# EAGLE board generic_controller_pcb (EAGLE 9.6.2)
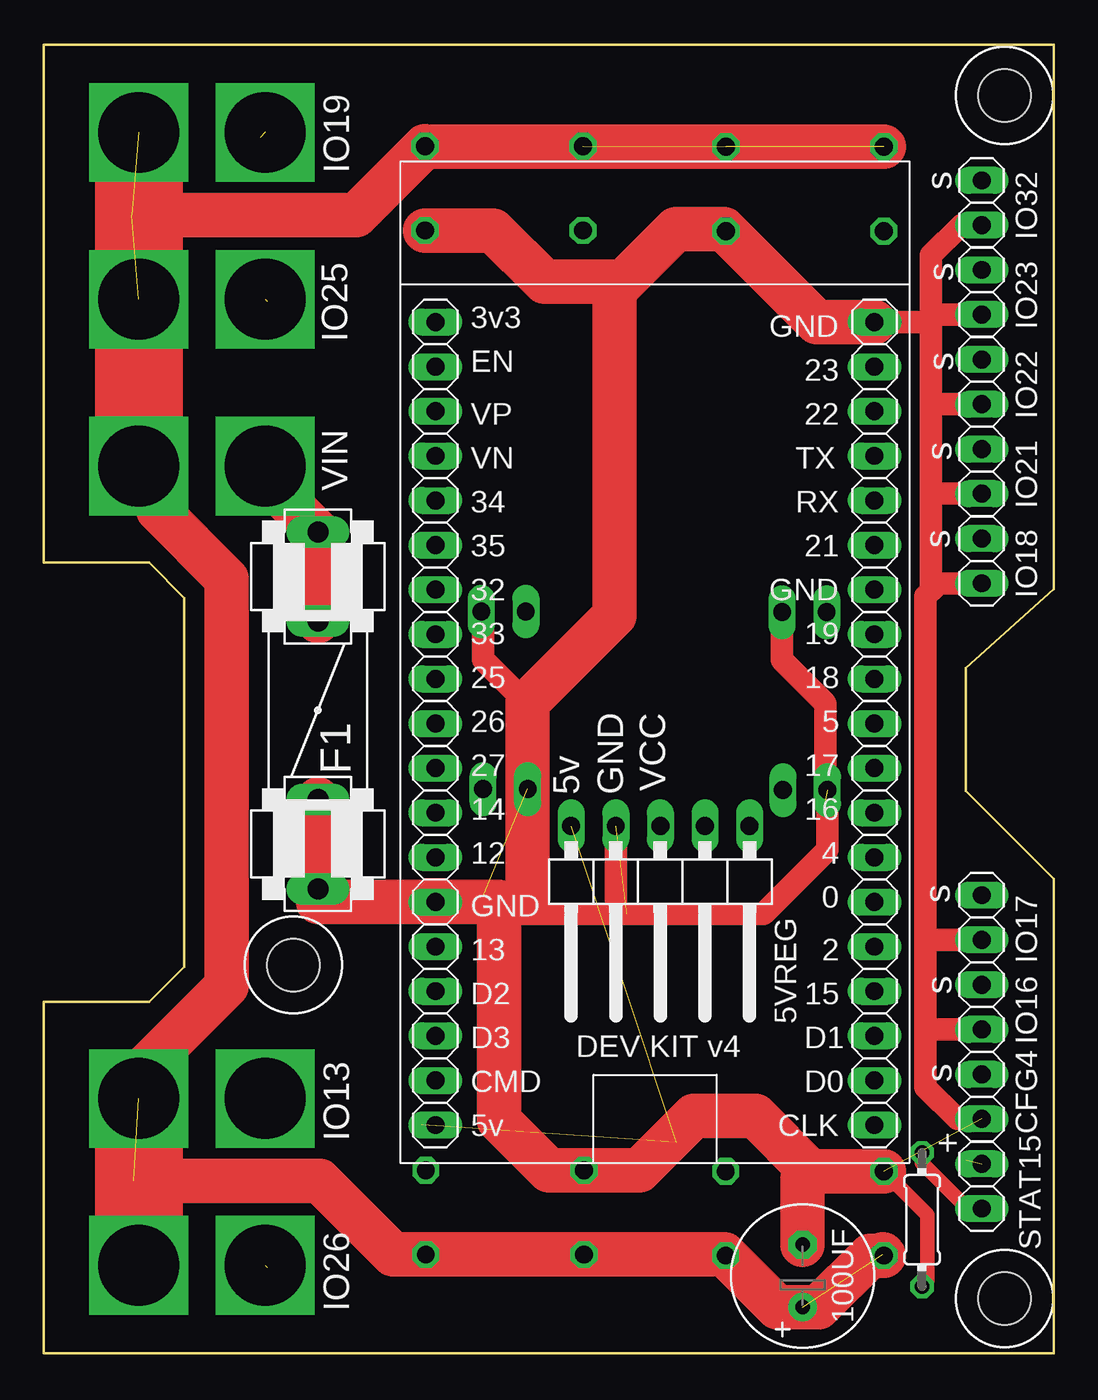
[diagram p0: board, top side]
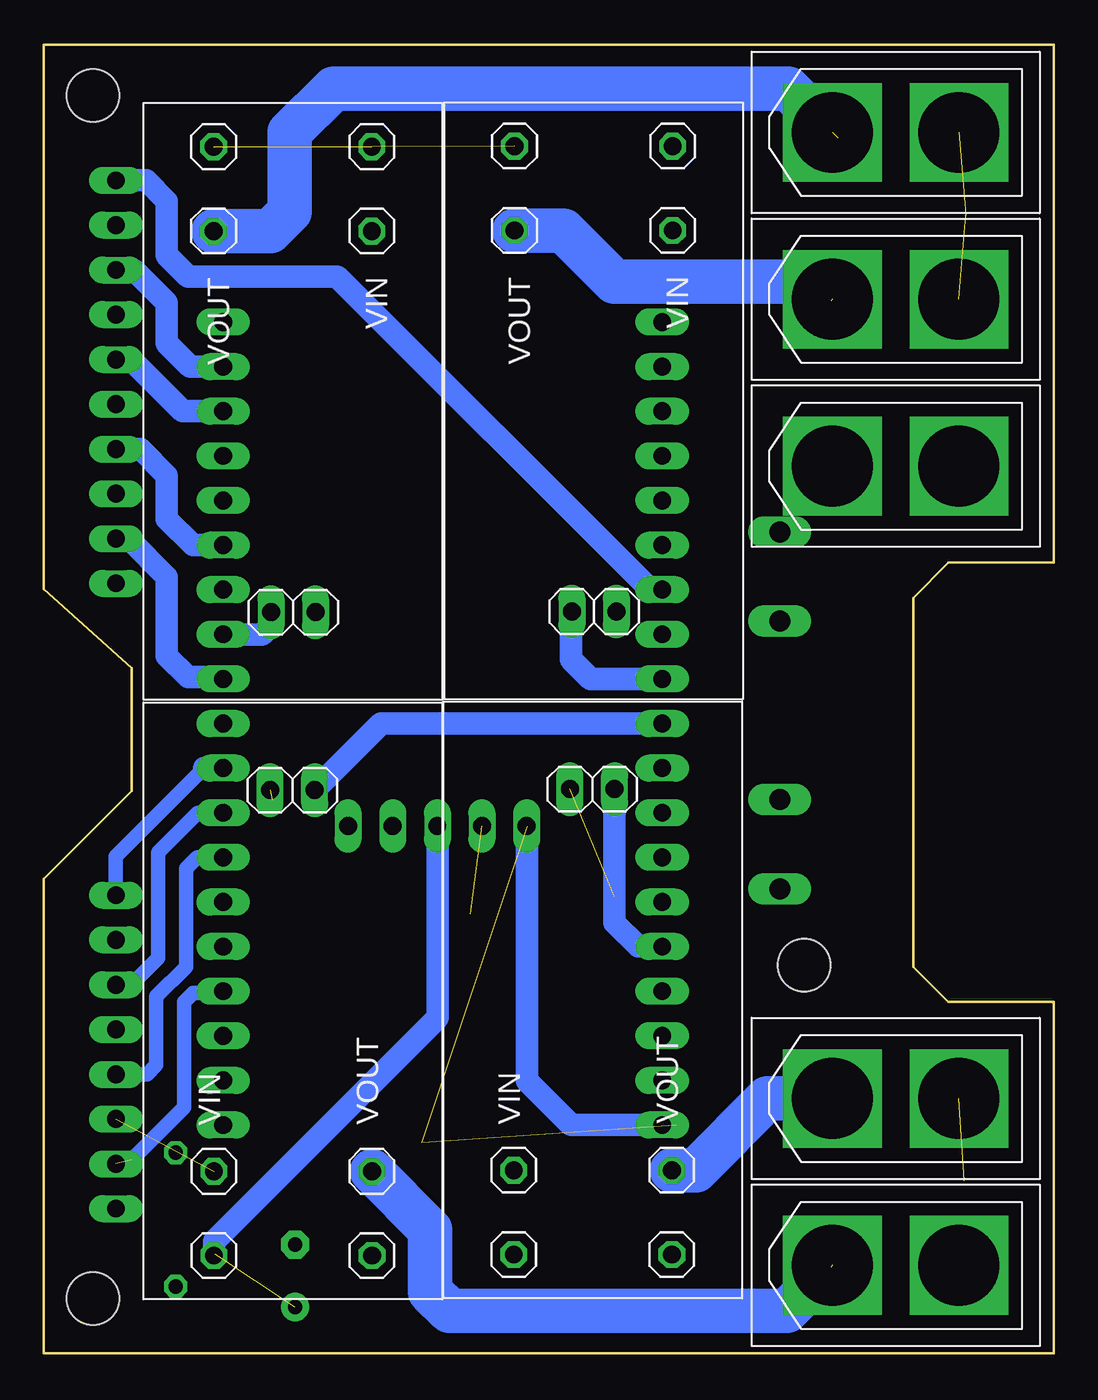
[diagram p1: board, bottom side, seen from below]

Size 57.5 x 74.5 mm. Coordinates in mm from the lower left corner, seen from the top.
Outline: 8,43 8,22 6,20 0,20 0,0 57.5,0 57.5,27 52.5,32 52.5,39 57.5,43.5 57.5,74.5 0,74.5 0,45 6,45 8,43
Copper layers (1*16): Top 0.035mm / dielectric 1.5mm / Bottom 0.035mm
Design rules "default": minimum track width 6mil, minimum drill 0.35mm, track to track 6mil, track to pad 6mil, pad to pad 6mil, via to via 6mil, smd to smd 6mil, copper to edge 40mil, drill to drill 6mil, minimum pad ring 10mil, minimum via ring 8mil, stop-mask expansion 4mil, vias tented up to drill 0mil, thermal gap 10mil
Holes 3 mm at 14.2,22.1 54.7,3.1 54.7,71.6

## Footprints (pad centres in the part's own frame; a part is rotated, then mirrored left to right if it is on the bottom)
1X05/90 = drill 1.016 long: 1 -5.08,-3.81; 2 -2.54,-3.81; 3 0,-3.81; 4 2.54,-3.81; 5 5.08,-3.81
E3,5-8 = drill 0.813 pad 1.6: + -1.778,0 | drill 0.813 pad 1.6 octagon: - 1.778,0
1X02 = drill 1.016 long: 1 -1.27,0; 2 1.27,0
ESP32 = drill 1.016 long: 1 -21.59,12.7; 2 -19.05,12.7; 3 -16.51,12.7; 4 -13.97,12.7; 5 -11.43,12.7; 6 -8.89,12.7; 7 -6.35,12.7; 8 -3.81,12.7; 9 -1.27,12.7; 10 1.27,12.7; 11 3.81,12.7; 12 6.35,12.7; 13 8.89,12.7; 14 11.43,12.7; 15 13.97,12.7; 16 16.51,12.7; 17 19.05,12.7; 18 21.59,12.7; 19 24.13,12.7; 20 -21.59,-12.3; 21 -19.05,-12.3; 22 -16.51,-12.3; 23 -13.97,-12.3; 24 -11.43,-12.3; 25 -8.89,-12.3; 26 -6.35,-12.3; 27 -3.81,-12.3; 28 -1.27,-12.3; 29 1.27,-12.3; 30 3.81,-12.3; 31 6.35,-12.3; 32 8.89,-12.3; 33 11.43,-12.3; 34 13.97,-12.3; 35 16.51,-12.3; 36 19.05,-12.3; 37 21.59,-12.3; 38 24.13,-12.3
FMALECON = drill 4.6 square: + -3.6,0; - 3.6,0
SW-M221 = drill 1.016 octagon: 1 -26.5,0; 2 -21.7,0; 3 -26.5,-9; 4 -21.7,-9 | drill 1.016 long: 5 0,-3.2; 6 0,-5.74
FUSE1 = drill 1.194 long: 1A -10.16,0; 1B -5.08,0; 2A 10.16,0; 2B 5.08,0
0204/7 = drill 0.813 octagon: 1 -3.81,0; 2 3.81,0

## Placement (x,y rotation side)
5VREG  [1X05/90]  35.1,26.2 180 top
100UF  [E3,5-8]  43.2,4.4 90 top
CFG4  [1X02]  53.4,14.6 90 top
E$1  [ESP32]  34.59,37.12 270 top
E$2  [FMALECON]  9,60 180 bottom
E$3  [SW-M221]  21.7,42.22 270 bottom
E$4  [SW-M221]  47.82,32.05 90 bottom
E$5  [FMALECON]  9,5 180 bottom
E$6  [SW-M221]  30.75,32.11 90 bottom
E$7  [SW-M221]  38.83,42.19 270 bottom
E$8  [FMALECON]  9,14.5 180 bottom
E$9  [FMALECON]  9,50.5 180 bottom
E$14  [FMALECON]  9,69.5 180 bottom
F1  [FUSE1]  15.6,36.6 270 top
IO16  [1X02]  53.4,19.7 90 top
IO17  [1X02]  53.4,24.8 90 top
IO18  [1X02]  53.4,45.1 90 top
IO21  [1X02]  53.4,50.2 90 top
IO22  [1X02]  53.4,55.3 90 top
IO23  [1X02]  53.4,60.4 90 top
IO32  [1X02]  53.4,65.5 90 top
R1  [0204/7]  50,7.6 90 top
STAT15  [1X02]  53.4,9.5 90 top

## Library data of the parts
5VREG CFG4 IO16-IO18 IO21-IO23 IO32 STAT15 = pinhead
100UF R1 = rcl
E$1 = ESP23 DevKitv4
E$2 E$5 E$8 E$9 E$14 = XT60Con
E$3 E$4 E$6 E$7 = SW-M221
F1 = special

## Nets
S$1: 5VREG.3 100UF.+ E$2.+ E$3.1 E$3.3 E$4.1 E$4.3 E$5.+ E$6.1 E$6.3 E$7.1 E$7.3 E$8.+ E$9.+ E$14.+
S$3: E$4.4 E$5.-
S$4: E$6.4 E$8.-
S$5: E$2.- E$3.4
S$6: E$7.4 E$14.-
S$7: 5VREG.5 E$1.38
S$8: R1.2 STAT15.1
S$9: E$1.8 E$7.6
S$10: E$1.28 E$3.6
S$11: E$1.29 E$4.6
S$12: E$1.34 E$6.6
S$13: E$9.- F1.1A F1.1B
S$16: CFG4.2 E$1.13
S$17: E$1.12 IO16.2
S$18: E$1.11 IO17.2
S$19: E$1.9 IO18.2
S$20: E$1.6 IO21.2
S$21: E$1.3 IO22.2
S$22: E$1.2 IO23.2
S$23: E$1.26 IO32.2
S$24: 5VREG.4 100UF.- CFG4.1 E$1.1 E$1.33 E$3.2 E$3.5 E$4.2 E$4.5 E$6.2 E$6.5 E$7.2 E$7.5 F1.2A F1.2B IO16.1 IO17.1 IO18.1 IO21.1 IO22.1 IO23.1 IO32.1 R1.1
S$25: E$1.16 STAT15.2

## Tracks (layer width: path | path; a pad name or v marks a point on that pad's centre or on a via)
S$1  (6 unrouted)
  Top 2.54: 5.1,9.8 15.7,9.8 19.89,5.61 E$6.3 E$6.1 38.76,5.61 E$4.3 41.77,2.6 44.1,2.6 47.05,5.55 E$4.1 47.76,5.61 | 5.4,14.75 E$8.+ 5.4,15.9 10.41,20.91 10.41,44.09 6.5,48 6.5,49.4 E$9.+ 4.95,50.05 | E$7.3 21.73,68.69 E$3.1 17.78,64.8 5,64.8
  Top 5: E$8.+ E$5.+ | E$14.+ E$9.+
  Bottom 1.27: 5VREG.3 35.1,19.1 47.82,6.38 E$4.1
S$3  (1 unrouted)
  Bottom 2.54: E$4.4 35.5,7.03 35.5,3.5 34.4,2.4 15.2,2.4 12.7,4.9
S$4
  Bottom 2.54: E$6.4 20.39,10.41 16.3,14.5 E$8.-
S$5  (1 unrouted)
  Bottom 2.54: 12.7,59.9 13.8,61 25,61 27.92,63.92 E$3.4
S$6  (1 unrouted)
  Bottom 2.54: E$7.4 44.61,63.89 43.5,65 43.5,69.5 41,72 15.1,72 12.3,69.2
S$7  (2 unrouted)
  Bottom 1.27: 5VREG.5 30,29.99 30,15.5 27.5,13 21.5,13
S$8
  Top 0.813: STAT15.1 52.6,8.23 50,10.83 R1.2
S$9
  Bottom 1.27: E$7.6 44.57,41.43 45.07,40.93 E$1.8
S$10
  Bottom 1.27: E$1.28 26.39,38.39 27.5,39.5 27.5,42.16 E$3.6
S$11
  Bottom 1.27: E$1.29 38.3,35.85 42.08,32.07 E$4.6
S$12
  Bottom 1.27: E$1.34 23.65,23.15 25.01,24.51 E$6.6
S$13
  Top 2.54: E$9.- 12.6,49.76 F1.1A F1.1B
S$16
  Bottom 0.813: E$1.13 48.77,28.23 49.4,27.6 49.4,22 51.1,20.3 51.1,16.4 51.63,15.87 CFG4.2
S$17
  Bottom 0.813: E$1.12 48.73,30.77 51,28.5 51,22.5 52.53,20.97 IO16.2
S$18
  Bottom 0.813: IO17.2 53.4,28.27 48.36,33.31
  Bottom 1.27: 48.36,33.31 E$1.11
S$19
  Bottom 1.27: E$1.9 47.41,38.5 49.3,38.5 50.5,39.7 50.5,44.2 52.67,46.37 IO18.2
S$20
  Bottom 1.27: IO21.2 52,51.47 50.5,49.97 50.5,47.5 49,46 E$1.6
S$21
  Bottom 1.27: E$1.3 49.59,53.63 52.54,56.57 IO22.2
S$22
  Bottom 1.27: E$1.2 49.17,56.17 50.5,57.5 50.5,59.8 52.37,61.67 IO23.2
S$23
  Bottom 1.27: E$1.26 22.33,43.5 23,43.5 40.8,61.3 49.3,61.3 50.5,62.5 50.5,65.6 51.67,66.77 IO32.2
S$24  (4 unrouted)
  Top 0.813: R1.1 50.3,4.09 50.3,7.87 E$4.2
  Top 1.27: E$3.5 25,42.12 25,39.5 27.5,37 27.5,26 26.5,25 33.2,25 | E$7.5 42.03,39.47 44.5,37 44.5,31.5 | E$4.5 44.62,28.64 40.98,25 32.56,25 5VREG.4 | 25.01,26.01 24.69,25.69 | CFG4.1 52,13.33 50.2,15.13 50.2,18.43 | 50.5,43.4 50.5,48.93 | 50.5,48.93 50.5,54.03 | 50.5,54.03 50.5,58.5 | 50.5,58.5 50.5,59.13 | 50.5,59.13 50.5,62.5 52.23,64.23 IO32.1 | E$1.1 50.29,58.71 50.5,58.5 | IO23.1 50.5,59.13 | IO22.1 50.5,54.03 | IO21.1 50.5,48.93 | IO18.1 50.93,43.83 50.5,43.4 | 50.5,43.4 50.2,43.1 50.2,23.6 | IO16.1 50.2,18.43 | 50.2,23.6 50.2,18.43 | IO17.1 50.27,23.53 50.2,23.6
  Top 2.54: 32.5,61 32.5,42 27.55,37.05 E$6.5 27.55,31.69 27.54,31.68 27.54,26.04 27.5,26 | E$1.1 44.01,58.71 E$7.2 38.72,64 36,64 33,61 28.5,61 25.58,63.92 E$3.2 | E$4.2 43.65,10.35 | F1.2A F1.2B 15.6,25.69 E$1.33 24.69,25.69 25.91,25.69 25.91,13.25 28.75,10.41 E$6.2 33.91,10.41 37,13.5 40.5,13.5 43.65,10.35 | 100UF.- 43.2,9.91 43.65,10.35
S$25  (1 unrouted)
  Bottom 0.813: E$1.16 47.4,20.5 49,20.5 49.5,20 49.5,14 52.5,11

## Text on the board
tPlace: IO19 | s | IO25 | s | s | VIN | s | s | 5v | GND | VCC | s | s | IO13 | s | + | IO26